# EAGLE board mav_nus_breakout (EAGLE 8.4.1)
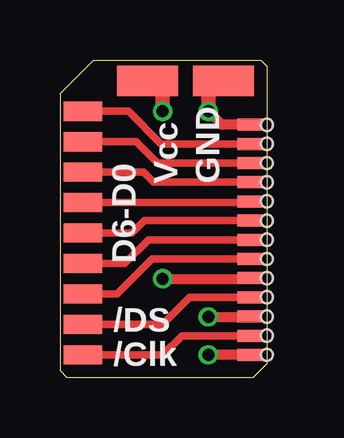
[diagram p0: board, top side]
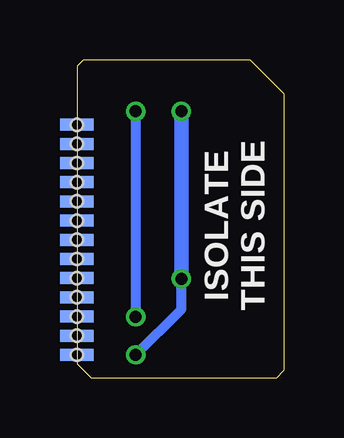
[diagram p1: board, bottom side, seen from below]

Size 8.64 x 13.26 mm. Coordinates in mm from the lower left corner, seen from the top.
Outline: 0,11.86 0,0.3 0.3,0 8.05,0 8.64,0.58 8.64,13 8.38,13.26 1.4,13.26 0,11.86
Copper layers (1*16): Top 0.035mm / dielectric 1.5mm / Bottom 0.035mm
Design rules "ITEADstudio_DRC": minimum track width 6mil, minimum drill 12mil, track to track 6mil, track to pad 6mil, pad to pad 6mil, via to via 6mil, smd to smd 0mil, copper to edge 10mil, drill to drill 10mil, minimum pad ring 10mil, minimum via ring 6mil, stop-mask expansion 2mil, vias tented up to drill 30mil, thermal gap 10mil
Holes 0.5 mm at 8.64,0.96 8.64,1.76 8.64,2.56 8.64,3.36 8.64,4.16 8.64,4.96 8.64,5.76 8.64,6.56 8.64,7.36 8.64,8.16 8.64,8.96 8.64,9.76 8.64,10.56

## Footprints (pad centres in the part's own frame; a part is rotated, then mirrored left to right if it is on the bottom)
SMD1,27-2,54 = smd 1.27 x 2.54: 1 0,0
SMD0,5-1,4 = smd 1.4 x 0.5: P$1 0,0
SMD0,8-1,6 = smd 0.8 x 1.6: P$1 0,0

## Placement (x,y rotation side)
PAD13  [SMD1,27-2,54]  3.65,12.39 270 top
PAD14  [SMD1,27-2,54]  6.83,12.39 270 top
U$211  SMD0,45  [SMD0,5-1,4]  8.1,5.76 0 top
U$212  SMD0,45  [SMD0,5-1,4]  8.1,4.16 0 top
U$213  SMD0,45  [SMD0,5-1,4]  8.1,0.96 0 top
U$214  SMD0,45  [SMD0,5-1,4]  8.1,2.56 0 top
U$215  SMD0,45  [SMD0,5-1,4]  8.1,10.56 0 top
U$216  SMD1  [SMD0,8-1,6]  0.95,4.77 90 top
U$217  SMD1  [SMD0,8-1,6]  0.95,3.5 90 top
U$218  SMD1  [SMD0,8-1,6]  0.95,2.23 90 top
U$219  SMD1  [SMD0,8-1,6]  0.95,0.96 90 top
U$220  SMD1  [SMD0,8-1,6]  0.95,6.04 90 top
U$221  SMD1  [SMD0,8-1,6]  0.95,7.31 90 top
U$222  SMD0,45  [SMD0,5-1,4]  8.1,4.96 0 top
U$223  SMD1  [SMD0,8-1,6]  0.95,8.58 90 top
U$224  SMD1  [SMD0,8-1,6]  0.95,9.85 90 top
U$225  SMD1  [SMD0,8-1,6]  0.95,11.12 90 top
U$226  SMD0,45  [SMD0,5-1,4]  8.1,3.36 0 top
U$227  SMD0,45  [SMD0,5-1,4]  8.1,1.76 0 top
U$228  SMD0,45  [SMD0,5-1,4]  8.1,6.56 0 top
U$229  SMD0,45  [SMD0,5-1,4]  8.1,7.36 0 top
U$230  SMD0,45  [SMD0,5-1,4]  8.1,8.16 0 top
U$231  SMD0,45  [SMD0,5-1,4]  8.1,8.96 0 top
U$232  SMD0,45  [SMD0,5-1,4]  8.1,9.76 0 top
U$233  SMD0,45  [SMD0,5-1,4]  8.65,0.96 0 bottom
U$234  SMD0,45  [SMD0,5-1,4]  8.65,10.56 0 bottom
U$235  SMD0,45  [SMD0,5-1,4]  8.65,9.76 0 bottom
U$236  SMD0,45  [SMD0,5-1,4]  8.65,8.96 0 bottom
U$237  SMD0,45  [SMD0,5-1,4]  8.65,8.16 0 bottom
U$238  SMD0,45  [SMD0,5-1,4]  8.65,7.36 0 bottom
U$239  SMD0,45  [SMD0,5-1,4]  8.65,6.56 0 bottom
U$240  SMD0,45  [SMD0,5-1,4]  8.65,5.76 0 bottom
U$241  SMD0,45  [SMD0,5-1,4]  8.65,4.96 0 bottom
U$242  SMD0,45  [SMD0,5-1,4]  8.65,4.16 0 bottom
U$243  SMD0,45  [SMD0,5-1,4]  8.65,3.36 0 bottom
U$244  SMD0,45  [SMD0,5-1,4]  8.65,2.56 0 bottom
U$245  SMD0,45  [SMD0,5-1,4]  8.65,1.76 0 bottom

## Library data of the parts
PAD13 PAD14 U$211-U$245 = wirepad

## Nets
N$67: U$211.P$1 U$216.P$1
N$68: U$217.P$1 U$222.P$1
N$69: U$218.P$1 U$226.P$1
N$70: U$219.P$1 U$227.P$1
N$71: U$220.P$1 U$228.P$1
N$72: U$221.P$1 U$229.P$1
N$73: U$223.P$1 U$230.P$1
N$74: U$224.P$1 U$231.P$1
N$75: U$225.P$1 U$232.P$1
N$76: PAD13.1 U$212.P$1 U$213.P$1
N$77: PAD14.1 U$214.P$1 U$215.P$1

## Tracks (layer width: path | path; a pad name or v marks a point on that pad's centre or on a via)
N$67
  Top 0.305: U$211.P$1 3.69,5.76 2.7,4.77 U$216.P$1
N$68
  Top 0.305: U$217.P$1 2.38,3.5 3.84,4.96 U$222.P$1
N$69
  Top 0.305: U$226.P$1 5.42,3.36 4.29,2.23 U$218.P$1
N$70
  Top 0.305: U$227.P$1 5.09,1.76 4.29,0.96 U$219.P$1
N$71
  Top 0.305: U$228.P$1 3.54,6.56 3.02,6.04 U$220.P$1
N$72
  Top 0.254: 8.05,7.31 U$229.P$1
  Top 0.305: U$221.P$1 8.05,7.31
N$73
  Top 0.305: U$230.P$1 3.91,8.16 3.49,8.58 U$223.P$1
N$74
  Top 0.305: U$231.P$1 4.07,8.96 3.17,9.85 U$224.P$1
N$75
  Top 0.305: U$232.P$1 4.22,9.76 2.86,11.12 U$225.P$1
N$76  (via drill 0.5)
  Top 0.356: 8.07,4.13 U$212.P$1
  Top 0.406: U$213.P$1 v6.19,0.96 | v4.29,4.13 8.07,4.13 | 4.29,12.39 PAD13.1
  Top 0.61: v4.29,11.12 4.29,12.39
  Bottom 0.406: v6.19,0.96 4.29,2.86 v4.29,4.13
  Bottom 0.61: v4.29,4.13 v4.29,11.12
N$77  (via drill 0.5)
  Top 0.356: 8.08,2.54 U$214.P$1 | 6.19,12.39 PAD14.1
  Top 0.406: U$215.P$1 6.75,10.56 v6.19,11.12 | v6.19,2.54 8.08,2.54
  Top 0.61: v6.19,11.12 6.19,12.39
  Bottom 0.406: v6.19,11.12 v6.19,2.54

## Text on the board
tNames: Vcc | GND | D6-D0 | /DS | /Clk
bNames: ISOLATE / THIS SIDE